# Altium PCB Projekt_Pcb.PcbDoc
Units mm, origin at the board's own origin, x right, y up, seen from the top; angles counter-clockwise.
Board outline 36 x 35 mm, 2 copper layers (Top Layer, Bottom Layer); 39 components, 31 nets, 164 pads, 17 vias.
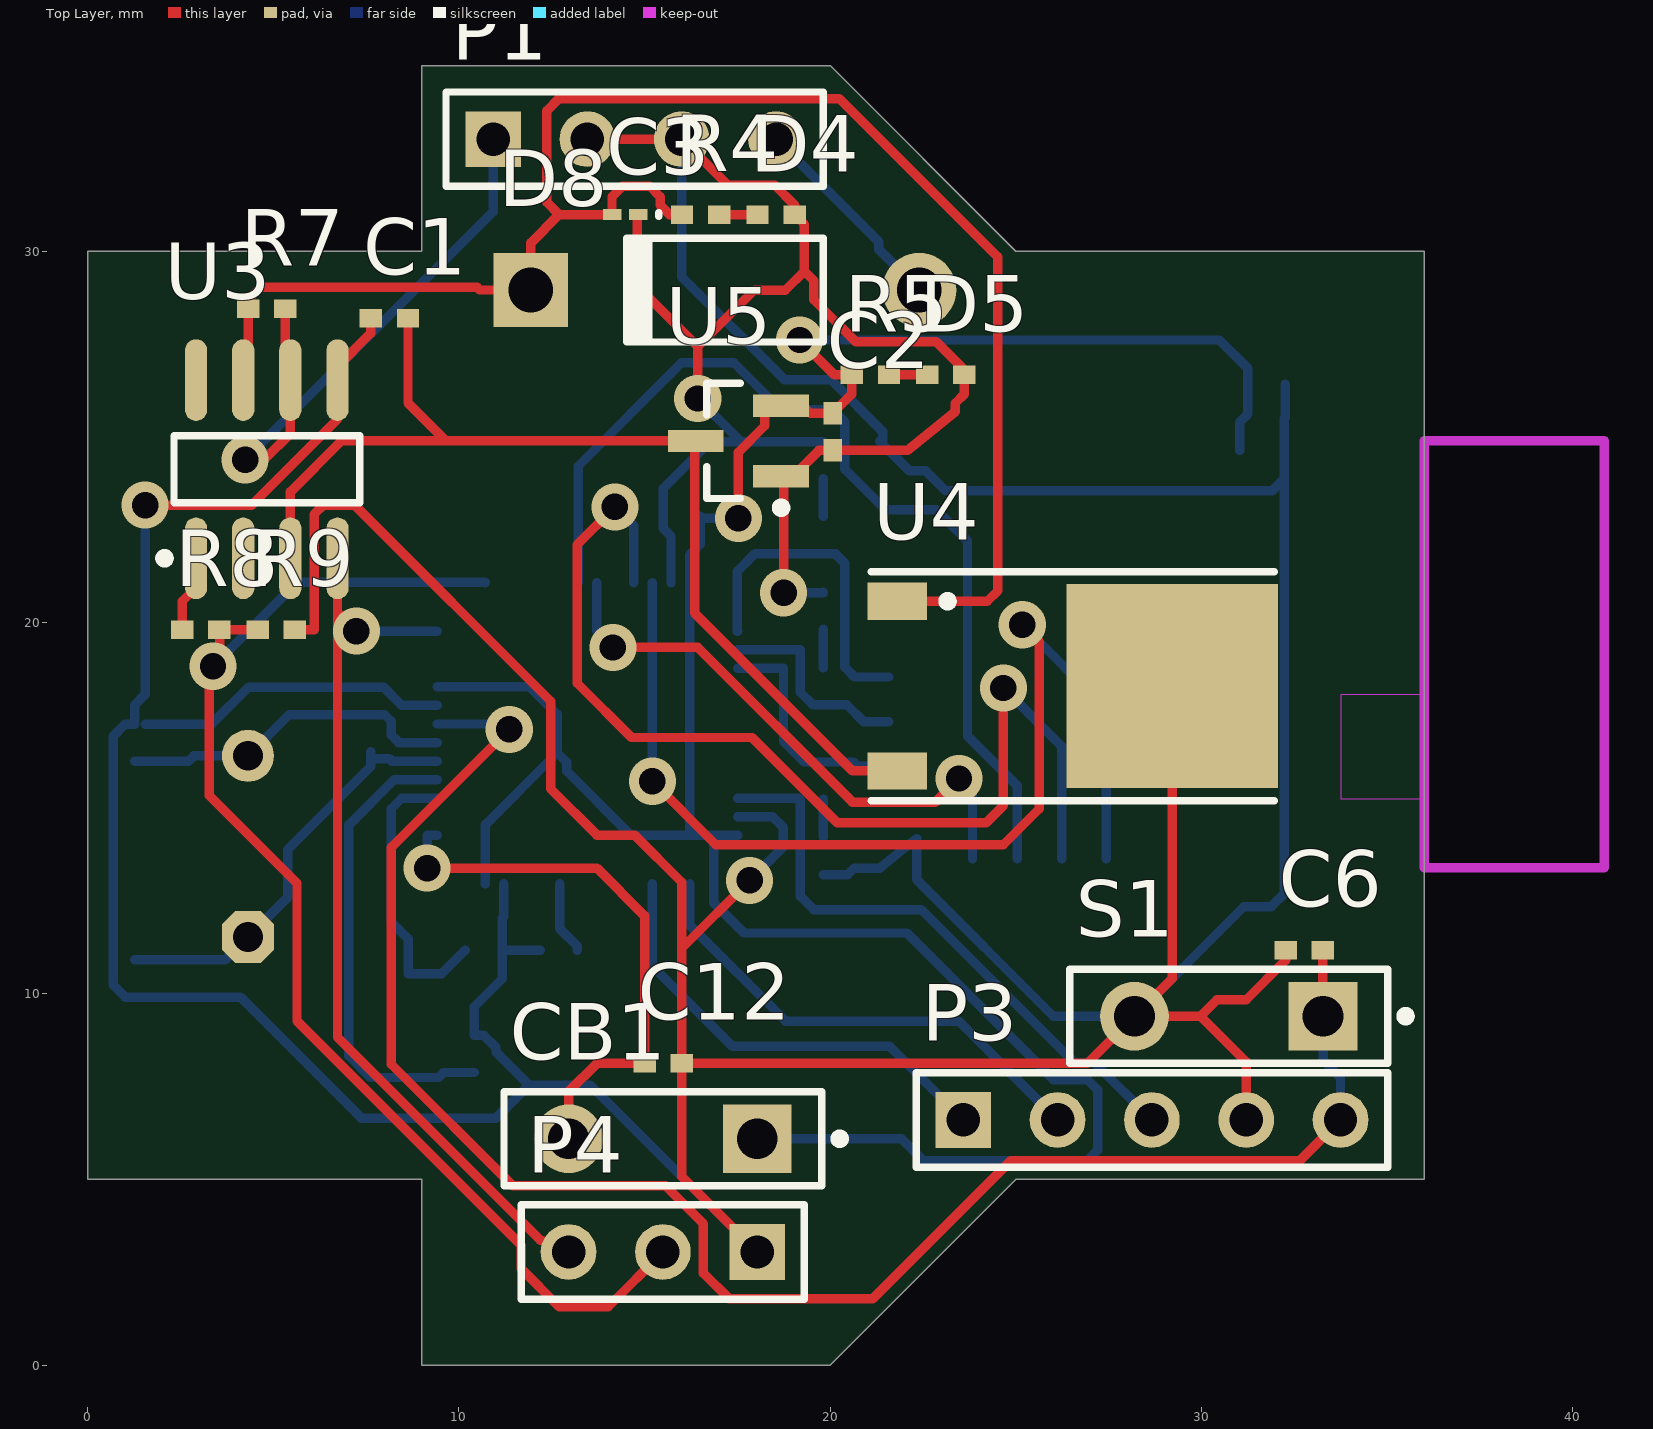
[diagram p0: Top Layer view]
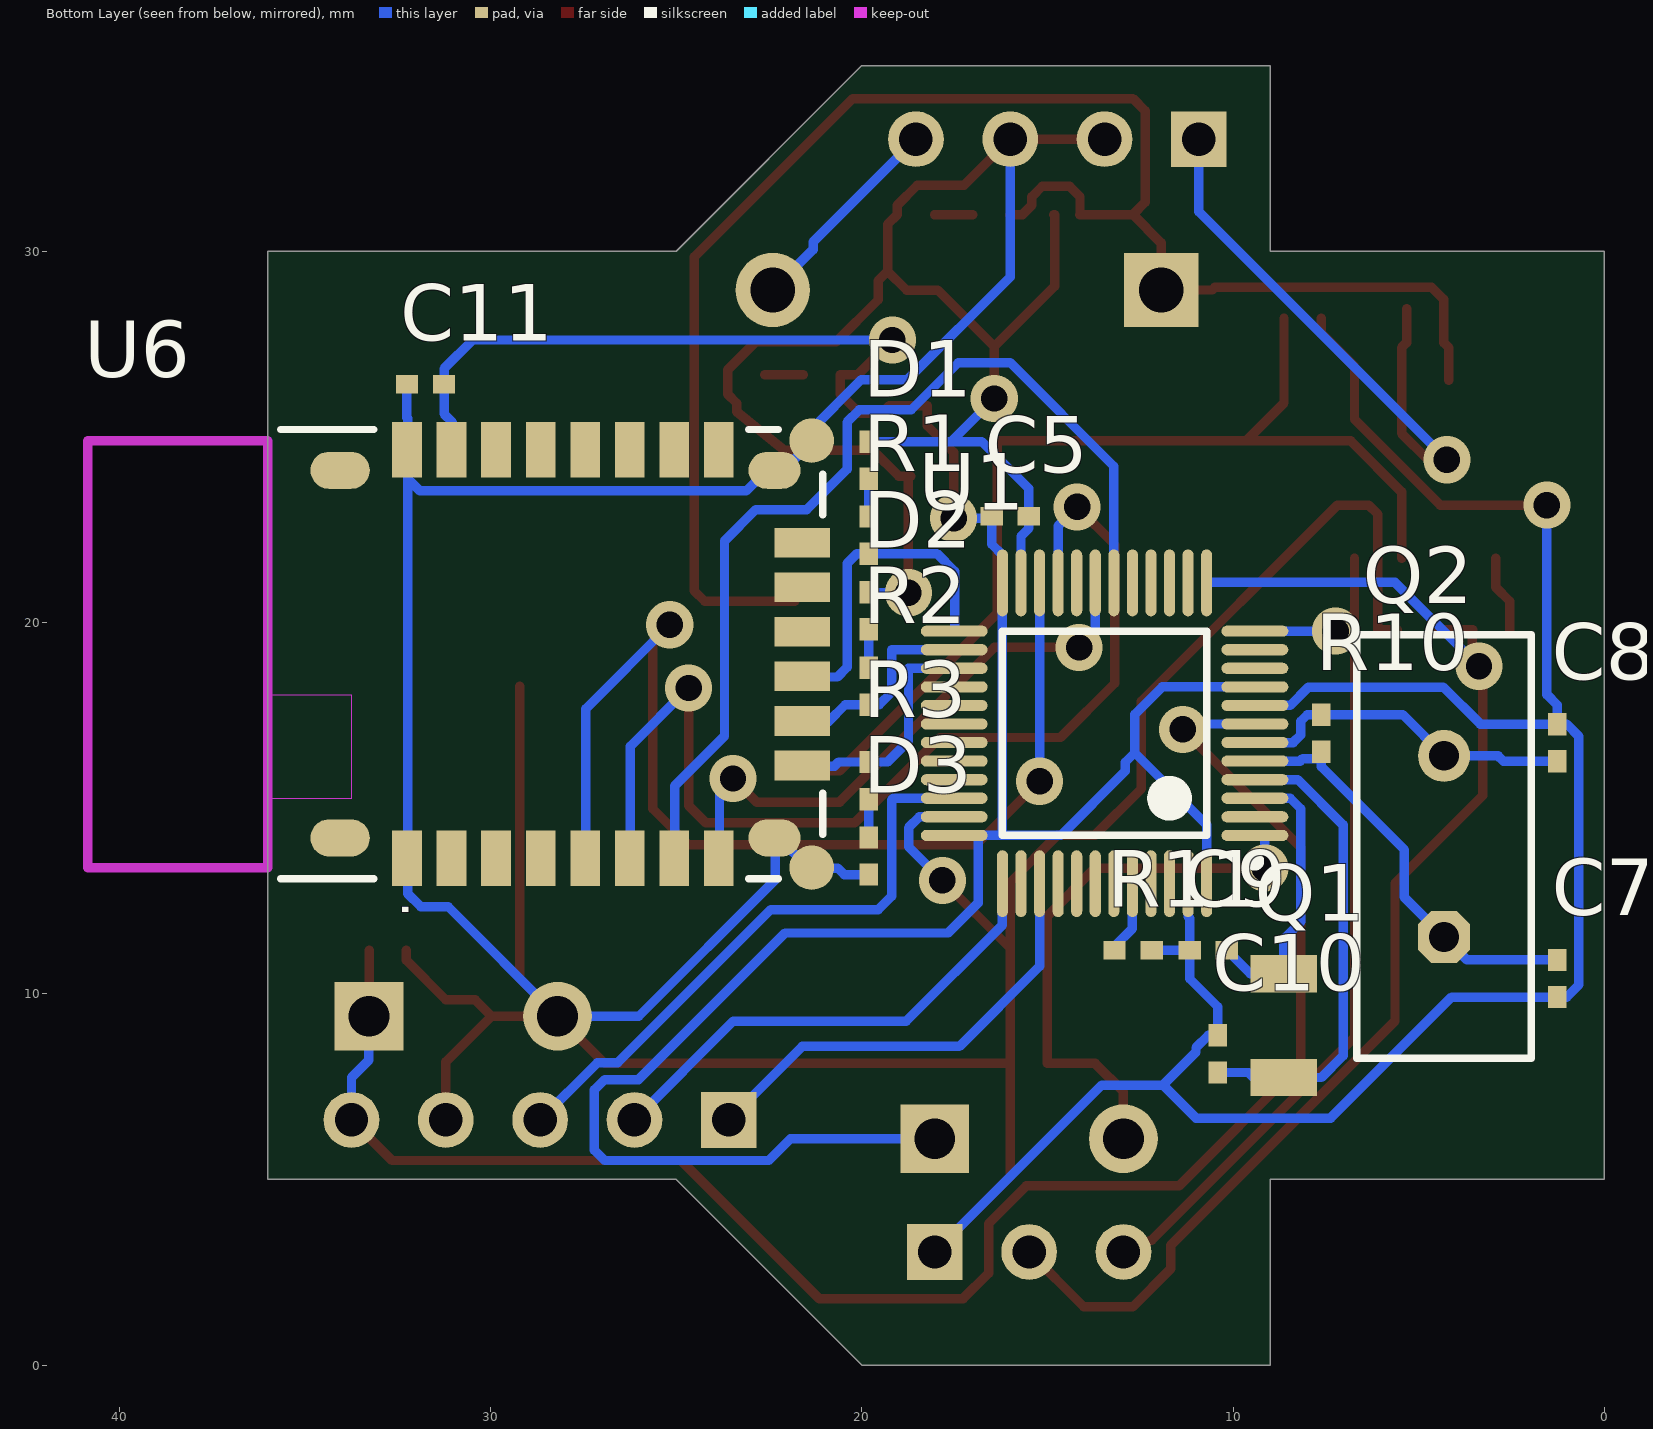
[diagram p1: Bottom Layer view, seen from below]

## Layer stack, top to bottom
Top Solder: solder mask 0.0102, Solder Resist, Dk 3.5
Top Layer: signal copper 0.0356
Dielectric1: dielectric 0.32, FR-4, Dk 4.8
Bottom Layer: signal copper 0.0356
Bottom Solder: solder mask 0.0102, Solder Resist, Dk 3.5

## Board outline
9,0 9,5 0,5 0,30 9,30 9,35 20,35 25,30 36,30 36,5 25,5 20,0

## Design rules (kind name [scope] priority, off if disabled: settings)
Clearance [All] p1: gap=0.2 ignorepadtopadclearanceinfootprint=TRUE except(0: Arc-Hole Track-Hole SMDPad-Hole THPad-Hole Via-Hole Fill-Hole Poly-Hole Region-Hole Text-Hole)
FabricationTestPointUsage TestPointUsage [All] p1: valid=0 allowmultiple=FALSE
FabricationTestpoint Testpoint [All] p1: side=3 testpointundercomponent=TRUE minsize=1.016 maxsize=2.54 preferedsize=1.524 minholesize=0 maxholesize=1.016 preferedholesize=0.813 testpointgrid=0.025 allowsidetop=TRUE allowsidebottom=TRUE usegrid=TRUE gridtolerance=0
PolygonConnect [All] p1: connectstyle=Relief reliefconductorwidth=0.254 reliefentries=4 polygonreliefangle="90 Angle" airgapwidth=0.254
RoutingVias [All] p1: holewidth=0.711 width=1.27 viastyle="Through Hole" minholewidth=0.711 minwidth=1.27 maxholewidth=0.711 maxwidth=1.27
SMDNeckDown [All] p1: percent=100.000
SilkToSolderMaskClearance SilkscreenOverComponentPads [IsPad] p1: minsilkscreentomaskgap=0.254 clearancetoexposedcopper=TRUE
SolderMaskExpansion [All] p1: expansion=0.102
Width [All] p1: maxlimit=0.254 minlimit=0.254 preferedwidth=0.254
27 further rules are at their usual default settings.

## Components (designator, comment, footprint, x,y, rotation, side; value= is the part's Value field where it differs from the comment)
C1 "1u" 0402 8.128,28.194 r0 top
C2 "1u" 0402 20.066,25.138 r90 top
C3 "1u" 0603 14.478,30.988 r180 top
C5 "100n" 0402 16.002,22.86 r0 bottom
C6 "100n" 0402 32.766,11.176 r0 top
C7 "22p" 0402 1.27,10.414 r270 bottom
C8 "22p" 0402 1.27,16.764 r90 bottom
C9 "10p" 0402 10.668,11.176 r180 bottom
C10 "10p" 0402 10.414,8.382 r270 bottom
C11 "4.7uF" 0402 31.75,26.416 r0 bottom
C12 "1u" 0402 15.502,8.128 r180 top
CB1 "Circuit Breaker" SPST-2 15.494,6.096 r180 top
D1 "Red" 0402 19.812,24.372 r90 bottom
D2 "Red" 0402 19.812,20.316 r90 bottom
D3 "Red" 0402 19.812,13.712 r270 bottom
D4 "Red" 0402 18.542,30.988 r0 top
D5 "Red" 0402 23.114,26.67 r0 top
D8 "Diode 1N4007" DO-41 17.168,28.956 r180 top
P1 "Header 4" HDR1X4 10.922,33.02 r0 top
P3 "Header 5" HDR1X5 23.584,6.604 r0 top
P4 "Header 3" HDR1X3 18.034,3.048 r180 top
Q1 "32.768kHz" Kwarc 8.636,9.144 r270 bottom
Q2 "8MHz" HC-49U 4.318,13.97 r90 bottom
R1 "330" 0402 19.812,22.356 r270 bottom
R2 "330" 0402 19.812,18.284 r270 bottom
R3 "330" 0402 19.812,15.744 r90 bottom
R4 "330" 0402 16.51,30.988 r180 top
R5 "330" 0402 21.082,26.67 r180 top
R7 "510" 0402 4.826,28.448 r0 top
R8 "12k" 0402 3.048,19.812 r180 top
R9 "22k" 0402 5.08,19.812 r180 top
R10 "1M" 0402 7.62,17.018 r270 bottom
R11 "10k" 0402 12.692,11.176 r180 bottom
S1 "SW-PB" SPST-2 30.734,9.398 r180 top
U1 "STM32F103CBT6" LQFP48_N 13.462,17.018 r0 bottom
U3 "L9637D" SO8_N 4.826,24.13 r90 top
U4 "MC78M05BDTRK" 369A-13 25.51,18.288 r270 top
U5 "MCP1703T-3302E/CB" SOT-23A-CB3_N 17.526,24.892 r180 top
U6 "RN4020-V/RM" RN4020_ALT 32.25,13.65 r90 bottom

## Footprints (in the part's own frame and the unit in brackets; to place one, negate y for a bottom-side part, rotate by r counter-clockwise, add the part's x,y. Pads: shape width x height; smd on the part's side, far side on the other; paste and mask are expansions set on the pad)
369A-13 [mm] "D-PAK/TO-252-AA; 3 Leads (1 Cropped); Body 10.3 (inc. leads) x 6.7 mm (LxW max)"
  rect 1x1.6 smd: 1(-2.285,-3.7) 3(2.285,-3.7)
  rect 5.5x5.7 smd: 4(0,3.7)
  silkscreen extent -3.08,-4.4 3.08,6.45
0402 [mm] "Chip Capacitor, Body 1.0x0.5mm, IPC High Density"
  rect 0.6x0.5 smd: 1(-0.5,0) 2(0.5,0)
  body extent -0.55,-0.3 0.55,0.3, height 1.3
0603 [mm] "Chip Inductor, Body 0.6x0.3mm, IPC High Density"
  rect 0.5x0.3 smd: 1(-0.35,0) 2(0.35,0)
  silkscreen extent -0.9,-0.05 -0.9,0.05, body extent -0.33,-0.18 0.33,0.18, height 0.55
DO-41 [mm] "Diode, Axial; Body 5.2 x 2.7 mm (LxDia. max), Lead Dia. 0.86 mm (max)"
  round 2 hole 1.2: 1(-5.23,0)
  rect 2x2 hole 1.2: 2(5.23,0)
  silkscreen extent -2.65,-1.4 2.75,1.4
HC-49U [mm] "Quartz Crystal, Thru-Hole; 2 Leads; Body 11.35 x 4.65 x 13.46 mm (LxWxH max)"
  oct 1.4x1.4 hole 0.8: 1(-2.44,0)
  round 1.4 hole 0.8: 2(2.44,0)
  silkscreen extent -5.7,-2.35 5.7,2.35
HDR1X3 [mm] "Connector; Header; 3 Position"
  rect 1.5x1.5 hole 0.9: 1(0,0)
  round 1.5 hole 0.9: 2(2.54,0) 3(5.08,0)
  silkscreen extent -1.27,-1.27 6.35,1.27
HDR1X4 [mm] "Connector; Header; 4 Position"
  rect 1.5x1.5 hole 0.9: 1(0,0)
  round 1.5 hole 0.9: 2(2.54,0) 3(5.08,0) 4(7.62,0)
  silkscreen extent -1.27,-1.27 8.89,1.27
HDR1X5 [mm] "Connector; Header; 5 Position"
  rect 1.5x1.5 hole 0.9: 1(0,0)
  round 1.5 hole 0.9: 2(2.54,0) 3(5.08,0) 4(7.62,0) 5(10.16,0)
  silkscreen extent -1.27,-1.27 11.43,1.27
Kwarc [mm] "Chip Inductor, Body 3.2x1.5mm, IPC High Density"
  rect 1x1.8 smd: 1(-1.397,0) 2(1.397,0)
  body extent -1.7,-0.9 1.7,0.9, height 0.55
LQFP48_N [mm] "Thin QFP, 48-Leads, Body 7x7mm, Pitch 0.5mm, IPC Medium Density"
  oval 1.8x0.3 smd: 1(-4.05,2.75) 2(-4.05,2.25) 3(-4.05,1.75) 4(-4.05,1.25) 5(-4.05,0.75) 6(-4.05,0.25) 7(-4.05,-0.25) 8(-4.05,-0.75) 9(-4.05,-1.25) 10(-4.05,-1.75) 11(-4.05,-2.25) 12(-4.05,-2.75) 25(4.05,-2.75) 26(4.05,-2.25) 27(4.05,-1.75) 28(4.05,-1.25) 29(4.05,-0.75) 30(4.05,-0.25) 31(4.05,0.25) 32(4.05,0.75) 33(4.05,1.25) 34(4.05,1.75) 35(4.05,2.25) 36(4.05,2.75)
  oval 0.3x1.8 smd: 13(-2.75,-4.05) 14(-2.25,-4.05) 15(-1.75,-4.05) 16(-1.25,-4.05) 17(-0.75,-4.05) 18(-0.25,-4.05) 19(0.25,-4.05) 20(0.75,-4.05) 21(1.25,-4.05) 22(1.75,-4.05) 23(2.25,-4.05) 24(2.75,-4.05) 37(2.75,4.05) 38(2.25,4.05) 39(1.75,4.05) 40(1.25,4.05) 41(0.75,4.05) 42(0.25,4.05) 43(-0.25,4.05) 44(-0.75,4.05) 45(-1.25,4.05) 46(-1.75,4.05) 47(-2.25,4.05) 48(-2.75,4.05)
  silkscreen extent -4.17,-2.75 2.75,3.57, body extent -3.5,-3.5 3.5,3.5, height 1.6
RN4020_ALT [mm] "Bluetooth BLE Module - Microchip"
  rect 1.5x0.8 smd: 1(0,0) 2(0,-1.2) 3(0,-2.4) 4(0,-3.6) 5(0,-4.8) 6(0,-6) 7(0,-7.2) 8(0,-8.4) 17(11,-8.4) 18(11,-7.2) 19(11,-6) 20(11,-4.8) 21(11,-3.6) 22(11,-2.4) 23(11,-1.2) 24(11,0)
  oval 1x1.6 smd: 1A(0.55,1.8) 24A(10.45,1.8)
  round 1.2 smd: 9(-0.25,-10.9) 16(11.25,-10.9)
  oval 1x1.4 smd: 9(0.55,-9.9) 16(10.45,-9.9)
  rect 0.8x1.5 smd: 10(2.5,-10.65) 11(3.7,-10.65) 12(4.9,-10.65) 13(6.1,-10.65) 14(7.3,-10.65) 15(8.5,-10.65)
  Keep-Out Layer region: -0.25,8.601 11.25,8.601 11.25,3.651 -0.25,3.651
  Keep-Out Layer region: 1.6,3.651 4.4,3.651 4.4,1.501 1.6,1.501
  silkscreen extent -0.55,-11.2 11.55,3.4, body extent -0.25,-10.9 11.25,8.6, height 2.3
SO8_N [mm] "SOIC, 8-Leads, Body 4.9x3.9mm, Pitch 1.27mm, IPC Medium Density"
  oval 2.2x0.6 smd: 1(-2.4,1.905) 2(-2.4,0.635) 3(-2.4,-0.635) 4(-2.4,-1.905) 5(2.4,-1.905) 6(2.4,-0.635) 7(2.4,0.635) 8(2.4,1.905)
  silkscreen extent -2.52,-2.5 0.9,2.88, body extent -1.95,-2.45 1.95,2.45, height 1.75
SOT-23A-CB3_N [mm] "SOT346, 3-Leads, Body 2.9x1.5mm, Pitch 0.95mm, Lead Span 2.6mm, IPC Medium Density"
  rect 1.5x0.6 smd: 1(-1.15,0.95) 2(-1.15,-0.95) 3(1.15,0)
  silkscreen extent -1.28,-1.55 0.85,1.92, body extent -0.85,-1.55 0.85,1.55, height 1.45
SPST-2 [mm] "Switch; 2 Leads"
  rect 1.85x1.85 hole 1.1: 1(-2.54,0)
  round 1.85 hole 1.1: 2(2.54,0)
  silkscreen extent -4.89,-1.27 4.28,1.27

## Part data
C1 C2 C3 C5 C6 C7 C8 C9 C10 C11 C12: library part Cap, "Capacitor", LatestRevisionDate=17-Jul-2002, LatestRevisionNote="Re-released for DXP Platform.", PackageDescription="Radial Cap, Thru-Hole; 2 Leads; 0.3 in Pin Spacing", PackageReference=RAD-0.3, Published=8-Jun-2000, Publisher="Altium Limited"
D1 D2 D3 D4 D5: library part LED2, "Typical RED, GREEN, YELLOW, AMBER GaAs LED", LatestRevisionDate=17-Jul-2002, LatestRevisionNote="Re-released for DXP Platform.", PackageDescription="SM LED; 2 Flat Leads", PackageReference=3.2X1.6X1.1, PackageVersion=Feb-2002, Published=8-Jun-2000, Publisher="Altium Limited"
D8: "1 Amp General Purpose Rectifier", Code_JEDEC=DO-204-AL, ComponentLink1Description="Manufacturer Link", ComponentLink1URL=http://www.fairchildsemi.com/, ComponentLink2Description=Datasheet, ComponentLink2URL=http://www.fairchildsemi.com/ds/1N%2F1N4001.pdf, DatasheetVersion=1998, LatestRevisionDate=17-Jul-2002, LatestRevisionNote="Re-released for DXP Platform.", PackageDescription="Diode, Axial; Body 5.2 x 2.7 mm (LxDia. max), Lead Dia. 0.86 mm (max)", PackageReference=DO-41, PackageVersion=Aug-1999, Published=8-Jun-2000, Publisher="Altium Limited"
P1: "Header, 4-Pin", LatestRevisionDate=17-Jul-2002, LatestRevisionNote="Re-released for DXP Platform.", Publisher="Altium Limited"
P3: "Header, 5-Pin", LatestRevisionDate=17-Jul-2002, LatestRevisionNote="Re-released for DXP Platform.", Publisher="Altium Limited"
P4: "Header, 3-Pin", LatestRevisionDate=17-Jul-2002, LatestRevisionNote="Re-released for DXP Platform.", Publisher="Altium Limited"
Q1: library part XTAL, "Crystal Oscillator", LatestRevisionDate=17-Jul-2002, LatestRevisionNote="Re-released for DXP Platform.", PackageDescription="Crystal, Thru-Hole; 2 Leads; Body 3.1 x 8.2 mm (Dia.xH)", PackageReference=R38, Published=8-Jun-2000, Publisher="Altium Limited"
Q2: library part ECS-10-13-1, "Crystal Oscillator", ComponentLink1Description="Manufacturer Link", ComponentLink1URL=http://www.ecsxtal.com/, ComponentLink2Description=Datasheet, ComponentLink2URL=http://www.ecsxtal.com/pdf2/HC49U.PDF, DatasheetDocument=18-Apr-2000, PackageReference=HC-49U, Published=17-Jul-2002, Publisher="Altium Limited"
R1 R2 R3 R4 R5 R7 R8 R9 R10 R11: library part Res2, "Resistor", LatestRevisionDate=17-Jul-2002, LatestRevisionNote="Re-released for DXP Platform.", PackageDescription="Axial Device, Thru-Hole; 2 Leads; 0.4 in Pin Spacing", PackageReference=AXIAL-0.4, Published=8-Jun-2000, Publisher="Altium Limited"
S1: "Switch", LatestRevisionDate=17-Jul-2002, LatestRevisionNote="Re-released for DXP Platform.", PackageDescription="Switch; 2 Leads", PackageReference=SPST-2, Published=24-Mar-1999, Publisher="Altium Limited"
U1: "STM32 ARM-based 32-bit MCU with 128 Kbytes Flash, 48-pin LQFP, Industrial Temperature", ComponentLink1Description="Manufacturer Link", ComponentLink1URL=www.st.com/stm32, ComponentLink2Description=Datasheet, ComponentLink2URL=http://www.st.com/stonline/products/literature/ds/13587.pdf, DatasheetVersion="rev6, Mar-2008", PackageDescription="48-Pin Low-Profile Quad Flat Pack, 7 x 7 mm Body, 0.5 mm Pitch (LQFP48)", PackageReference=LQFP48, PackageVersion=Mar-2008, Published=30-May-2008, Publisher="Altium Limited"
U3: "ISO 9141 Interface", Code_IPC=SOIC127P600-8, Code_JEDEC=MS-012-AA, ComponentLink1Description="Manufacturer Link", ComponentLink1URL=http://www.st.com/, ComponentLink2Description=Datasheet, ComponentLink2URL=http://www.st.com/stonline/products/literature/ds/1765/l9637.pdf, DatasheetVersion=Dec-1998, LatestRevisionDate=13-Apr-2006, LatestRevisionNote="IPC-7351 Footprint Added.", PackageDescription="8-Pin Small Outline Integrated Circuit 1.27 mm Pitch", PackageReference=SO8, PackageVersion=Dec-2002, Published=24-Aug-2001, Publisher="Altium Limited"
U4: "Three-Terminal Medium Current Positive Voltage Regulator", ComponentLink1Description="Manufacturer Link", ComponentLink1URL=http://www.onsemi.com/site/products/taxonomy/0,4438,503,00.html, ComponentLink2Description=Datasheet, ComponentLink2URL=http://www.onsemi.com/pub/Collateral/MC78M00-D.PDF, DatasheetVersion=Apr-2000, Note="Pin 2 is electrically connected to Pin 4; Pin 2 is trimmed and not drawn;", PackageDescription="D-PAK/TO-252-AA; 3 Leads (1 Cropped); Body 10.3 (inc. leads) x 6.7 mm (LxW max)", PackageReference=369A-13, PackageVersion=1997, Published=15-Apr-2002, Publisher="Altium Limited"
U5: "250 mA, 16V, Low Quiescent Current LDO Regulator, 3-Pin SOT-23A, Extended Temperature, Tape and Reel", Supplier Part Number 1=MCP1703T-3302E/CBTR-ND, ComponentLink1Description=Datasheet, ComponentLink1URL=http://ww1.microchip.com/downloads/en/DeviceDoc/22049d.pdf, ComponentLink2Description="Packaging Specification", ComponentLink2URL=http://www.microchip.com/stellent/groups/techpub_sg/documents/packagingspec/en012702.pdf, ComponentLink3Description="Microchip.com Home", ComponentLink3URL=http://www.microchip.com/, DatasheetVersion="revD, Sep-2009", PackageDescription="3-Lead Plastic Small Outline Transistor (CB) [SOT-23A]", PackageReference=SOT-23A-CB3, PackageVersion="revBB, Aug-2009", Published=29-Jan-2009, Publisher="Altium Limited", Supplier 1=Digi-Key, Supplier 2=Digi-Key, Supplier 3=Digi-Key, Supplier 4=Farnell, Supplier Part Number 2=MCP1703T-3302E/CBCT-ND, Supplier Part Number 3=MCP1703T-3302E/CBDKR-ND, Supplier Part Number 4=1439518
U6: library part RN2020-V/RM123, "Microchip RN4020 Bluetooth"
CB1: LatestRevisionDate=17-Jul-2002, LatestRevisionNote="Re-released for DXP Platform.", PackageDescription="Switch; 2 Leads", PackageReference=SPST-2, Published=24-Mar-1999, Publisher="Altium Limited"

## Via types
v1: diameter 1.27, hole 0.711, Top Layer to Bottom Layer, 17 vias

## Nets (pads, with @x,y where several pads share a name; then routed paths per layer and width w, separated by ;. In a path a pad name is that pad's centre, name@x,y a point inside that pad or via, vN(x,y) a via of type N, cw(c..) or ccw(c..) an arc to the next point about the centre after c; other vN are vias at no path point)
3.3V: C2.2 C5.2 C11.1 CB1.1 R5.2 U1.9 U1.24 U1.36 U1.48 U5.2 U6.23 | length 73.1
  Top Layer w0.254: v1(17.526,22.809) 17.526,24.587 18.237,25.298 18.237,25.842 U5.2 19.253,25.842 19.457,25.638 C2.2 20.582,26.154 R5.2 20.117,26.67 v1(19.177,27.61)
  Bottom Layer w0.254: U1.9 11.907,18.268 12.649,17.526 12.649,16.491 ; U1.48 10.712,14.554 12.649,16.491 ; U1.36 U1.36@16.869,14.268 ; v1@17.526,22.606 v1(17.526,22.809) 16.553,22.809 C5.2 16.502,22.109 16.212,21.819 U1.24 16.212,14.268 ; CB1.1 21.92,6.096 22.504,5.512 26.924,5.512 27.203,5.791 27.203,7.413 26.924,7.692 26.014,7.692 22.066,11.64 17.675,11.64 16.869,12.446 U1.36@16.869,14.268 ; v1(19.177,27.61) 30.48,27.61 31.25,26.84 C11.1 31.25,25.618 31.032,25.4 U6.23@31.032,24.634 ; 12.649,16.491 12.903,16.237 12.903,16.002 14.637,14.268 16.212,14.268 ; 16.212,14.268 U1.36@16.869,14.268
12V: D8.1 P1.4 | length 5.7
  Bottom Layer w0.254: P1.4 21.311,30.251 21.311,30.043 D8.1
GND: C1.1 C2.1 C3.1 C5.1 C6.1 C7.2 C8.2 C9.1 C10.1 C11.2 C12.1 D1.2 D2.2 D3.2 D4.2 D5.2 P1.2 P1.3 P3.4 P4.1 R9.1 R11.2 S1.2 U1.8 U1.23 U1.35 U1.47 U3.5 U4.4 U5.1 U6.1 U6.9 U6.16 U6.24 | length 222.2
  Top Layer w0.254: v1(1.549,23.165) 4.42,23.165 6.731,25.476 U3.5 6.731,26.899 7.628,27.796 C1.1 ; R9.1 6.101,19.812 6.101,22.916 6.35,23.165 7.188,23.165 12.471,17.882 12.471,15.519 13.716,14.275 14.732,14.275 16.002,13.005 16.002,11.227 ; P1.2 P1.3 17.247,31.775 18.509,31.775 19.042,31.242 D4.2 19.304,30.726 19.304,29.464 ; C3.1 14.808,30.988 14.808,29.058 16.434,27.432 ; v1(16.434,26.035) 16.434,27.432 ; v1(17.831,13.056) 16.002,11.227 ; P4.1 16.002,5.08 C12.1 ; U5.1 U5.1@18.745,23.942 ; v1(18.745,20.803) U5.1@18.745,23.942 ; U4.4 29.21,10.414 S1.2 ; P3.4 31.204,8.166 29.972,9.398 ; C6.1 32.266,10.905 31.204,9.843 30.417,9.843 29.972,9.398 ; C12.1 26.924,8.128 S1.2 ; C12.1 16.002,11.227 ; 16.434,27.432 17.95,28.948 18.788,28.948 19.304,29.464 ; U5.1@18.745,23.942 18.999,23.942 19.695,24.638 C2.1 22.09,24.638 23.368,25.679 23.368,25.908 23.614,26.154 D5.2 23.614,26.805 22.86,27.559 20.693,27.559 19.558,28.694 19.558,29.21 19.304,29.464 ; S1.2 29.972,9.398
  Bottom Layer w0.254: 1.549,17.264 3.339,17.264 4.338,18.263 7.968,18.263 8.463,17.768 U1.8 ; v1(1.549,23.165) 1.549,18.059 1.27,17.78 C8.2 1.016,17.264 0.686,16.934 0.686,10.244 1.016,9.914 C7.2 4.115,9.914 7.374,6.655 10.998,6.655 11.887,7.544 ; U1.47 11.212,12.084 11.168,12.04 C9.1 ; R11.2 C9.1 ; U1.23 15.712,22.327 15.502,22.537 C5.1 15.502,23.61 16.764,24.872 17.597,24.872 ; P1.3 16.002,29.307 18.766,26.543 20.015,26.543 21.412,25.146 U6.16@21.412,24.804 ; v1(16.434,26.035) 17.597,24.872 ; U1.35 18.449,14.768 18.739,14.478 18.739,13.964 v1(17.831,13.056) ; P4.1 13.538,7.544 11.887,7.544 ; v1(18.745,20.803) 19.812,20.803 D2.2 ; D3.2 20.472,13.212 20.644,13.384 21.332,13.384 U6.9@22.327,14.184 ; D1.2 17.597,24.872 ; U6.16@21.332,24.884 U6.16@21.412,24.804 ; U6.9@22.332,14.184 U6.9@22.327,14.184 ; C11.2 32.25,25.52 32.232,25.502 32.232,24.634 32.232,23.876 ; C9.1 11.168,10.406 10.414,9.652 C10.1 10.668,8.882 10.998,8.552 10.998,8.433 11.887,7.544 ; U6.16@21.412,24.804 22.132,24.084 22.332,24.084 22.576,24.084 23.114,23.546 31.902,23.546 32.232,23.876 ; U6.9@22.327,14.184 22.327,13.081 26.01,9.398 S1.2 31.14,12.344 31.876,12.344 32.232,12.7 32.232,13.634 32.232,23.876
"ISO9141-2 K": P1.1 R7.2 U3.6 | length 16.3
  Top Layer w0.254: v1(4.242,24.384) 4.75,24.384 5.461,25.095 U3.6 5.461,27.407 5.326,27.542 R7.2
  Bottom Layer w0.254: v1(4.242,24.384) 10.922,31.064 P1.1
NetC1_2: C1.2 U3.3 U4.3 U5.3 | length 28.9
  Top Layer w0.254: U3.3 5.461,23.52 6.833,24.892 9.652,24.892 ; C1.2 8.628,25.916 9.652,24.892 ; U5.3 U5.3@16.358,24.892 ; U4.3 20.601,16.003 16.358,20.246 U5.3@16.358,24.892 ; 9.652,24.892 U5.3@16.358,24.892
NetC3_2: C3.2 D8.2 R4.2 R7.1 U3.7 U4.1 | length 45.5
  Top Layer w0.254: U3.7 4.191,27.407 4.326,27.542 R7.1 4.326,28.702 4.656,29.032 10.49,29.032 10.566,28.956 D8.2 11.938,30.226 12.7,30.988 ; C3.2 C3.2@14.122,30.988 ; R4.2 15.672,30.988 15.418,31.242 15.418,31.471 15.138,31.75 14.402,31.75 14.122,31.471 C3.2@14.122,30.988 ; U4.1 24.232,20.573 24.511,20.852 24.511,29.847 20.246,34.112 12.7,34.112 12.37,33.782 12.37,31.318 12.7,30.988 ; 12.7,30.988 C3.2@14.122,30.988
NetC7_1: C7.1 Q2.1 R10.2 U1.5 | length 11.5
  Bottom Layer w0.254: C7.1 3.702,10.914 Q2.1 5.387,12.599 5.387,13.882 7.62,16.115 R10.2@7.62,16.337 ; R10.2 R10.2@7.62,16.337 ; U1.5 8.197,16.268 8.128,16.337 R10.2@7.62,16.337
NetC8_1: C8.1 Q2.2 R10.1 U1.6 | length 9.2
  Bottom Layer w0.254: C8.1 2.718,16.264 2.864,16.41 Q2.2 5.426,17.518 R10.1 8.001,17.518 8.179,17.34 8.179,16.972 8.382,16.768 U1.6
NetC9_2: C9.2 Q1.1 U1.3 | length 7.8
  Bottom Layer w0.254: U1.3 8.461,15.268 8.179,14.986 8.179,11.938 8.636,11.481 Q1.1 9.533,10.541 C9.2
NetC10_2: C10.2 Q1.2 U1.4 | length 12.8
  Bottom Layer w0.254: U1.4 8.255,15.768 7.036,14.549 7.036,8.331 7.62,7.747 Q1.2 9.449,7.747 9.584,7.882 C10.2
NetC12_2: C12.2 CB1.2 U1.1 | length 15.1
  Top Layer w0.254: v1(9.144,13.386) 13.716,13.386 15.002,12.1 C12.2 13.716,8.128 12.954,7.366 CB1.2
  Bottom Layer w0.254: v1(9.144,13.386) 9.144,14.268 U1.1
NetD1_1: D1.1 R1.1 | length 1
  Bottom Layer w0.254: R1.1 D1.1
NetD2_1: D2.1 R2.1 | length 1
  Bottom Layer w0.254: R2.1 D2.1
NetD3_1: D3.1 R3.1 | length 1
  Bottom Layer w0.254: D3.1 R3.1
NetD4_1: D4.1 R4.1 | length 1
  Top Layer w0.254: R4.1 D4.1
NetD5_1: D5.1 R5.1 | length 1
  Top Layer w0.254: R5.1 D5.1
NetP3_1: P3.1 U1.39 | length 12.3
  Bottom Layer w0.254: U1.39 15.212,10.744 17.371,8.585 21.603,8.585 P3.1
NetP3_2: P3.2 U1.37 | length 13.2
  Bottom Layer w0.254: U1.37 16.212,11.855 18.806,9.261 23.467,9.261 P3.2
NetP3_3: P3.3 U1.34 | length 16.3
  Bottom Layer w0.254: U1.34 19.156,15.268 19.193,15.231 19.193,12.633 19.558,12.268 22.454,12.268 26.576,8.146 27.122,8.146 P3.3
NetP4_2: P4.2 R8.1 R9.2 U1.13 | length 35.6
  Top Layer w0.254: v1(3.378,18.821) 3.556,18.999 v1@3.556,19.32 ; R8.1 R8.1@3.556,19.812 ; R9.2 R8.1@3.556,19.812 ; P4.2 14.021,1.575 12.7,1.575 11.684,2.591 11.684,3.224 5.639,9.269 5.639,12.979 3.277,15.342 3.277,19.05 v1@3.556,19.32 ; v1@3.556,19.32 R8.1@3.556,19.812
  Bottom Layer w0.254: v1(3.378,18.821) 5.639,21.082 10.712,21.082 U1.13
NetP4_3: P4.3 U1.12 U3.4 | length 24.3
  Top Layer w0.254: U3.4 6.731,20.276 ; v1(7.239,19.768) 6.731,20.276 ; P4.3 12.192,3.368 6.731,8.829 6.731,20.276
  Bottom Layer w0.254: v1(7.239,19.768) U1.12
NetR8_2: R8.2 U3.1 | length 2.1
  Top Layer w0.254: R8.2 2.548,20.574 2.921,20.947 U3.1
NetR11_1: R11.1 U1.44 | length 2
  Bottom Layer w0.254: U1.44 12.712,11.76 13.192,11.28 R11.1
NetU1_18: U1.18 U6.7 | length 26.6
  Bottom Layer w0.254: U1.18 13.212,24.21 15.999,26.997 17.404,26.997 18.67,25.73 20.066,25.73 20.396,25.4 20.396,24.13 21.488,23.038 22.86,23.038 23.698,22.2 23.698,16.942 25.032,15.608 U6.7@25.032,13.634
NetU1_19: U1.19 U6.8 | length 15.5
  Top Layer w0.254: v1(14.148,19.329) 16.434,19.329 20.599,15.164 22.835,15.164 v1(23.47,15.799)
  Bottom Layer w0.254: U1.19 13.712,19.765 v1(14.148,19.329) ; v1(23.47,15.799) 23.832,15.436 U6.8@23.832,13.634
NRST: C6.2 P3.5 S1.1 U1.7 | length 48.1
  Top Layer w0.254: v1(11.358,17.124) 8.179,13.945 8.179,8.103 11.455,4.826 15.57,4.826 16.586,3.81 16.586,2.477 17.272,1.792 21.15,1.792 24.87,5.512 32.652,5.512 P3.5 ; C6.2 33.266,9.406 S1.1
  Bottom Layer w0.254: U1.7 11.213,17.268 v1(11.358,17.124) ; S1.1 33.274,8.217 33.744,7.747 P3.5
PIO1: R3.2 U1.27 U6.10 | length 6.3
  Bottom Layer w0.254: U1.27 18.741,18.768 18.741,16.807 19.304,16.244 R3.2 20.625,16.244 20.735,16.134 U6.10@21.582,16.134
PIO2: R2.2 U1.26 U6.11 | length 5.5
  Bottom Layer w0.254: U1.26 19.195,19.268 19.195,18.121 19.533,17.784 R2.2 20.447,17.784 20.897,17.334 U6.11@21.582,17.334
PIO3: R1.2 U1.25 U6.12 | length 8.9
  Bottom Layer w0.254: U1.25 17.501,19.768 17.501,21.38 17.977,21.856 R1.2 20.13,21.856 20.396,21.59 20.396,18.796 20.658,18.534 U6.12@21.582,18.534
UART1_RX_STM: U1.22 U6.5 | length 29.3
  Top Layer w0.254: v1(15.212,15.725) 16.92,14.018 24.66,14.018 25.629,14.986 25.629,19.482 v1(25.171,19.939)
  Bottom Layer w0.254: v1(15.212,15.725) U1.22 ; v1(25.171,19.939) 27.432,17.678 U6.5@27.432,13.634
UART1_TX_STM: U1.21 U6.6 | length 29.1
  Top Layer w0.254: v1(14.202,23.114) 13.186,22.098 13.186,18.367 14.648,16.905 17.893,16.905 20.193,14.605 24.2,14.605 24.663,15.069 v1(24.663,18.237)
  Bottom Layer w0.254: v1(14.202,23.114) 14.712,22.604 U1.21 ; v1(24.663,18.237) 26.232,16.669 U6.6@26.232,13.634
pads on no net: U1.2 U1.10 U1.11 U1.14 U1.15 U1.16 U1.17 U1.20 U1.28 U1.29 U1.30 U1.31 U1.32 U1.33 U1.38 U1.40 U1.41 U1.42 U1.43 U1.45 U1.46 U3.2 U3.8 U6.1A U6.2 U6.3 U6.4 U6.13 U6.14 U6.15 U6.17 U6.18 U6.19 U6.20 U6.21 U6.22 U6.24A

## Keep-outs
Keep-Out Layer:
  lines w0.254: 36,13.4 36,24.9 40.851,24.9 40.851,13.4 36,13.4

## Silkscreen, mask and mechanical layers (free items; w line width, h text height)
Mechanical 1:
  the board outline again, w1.2
Mechanical 16:
  drawing of 1874 lines, arcs and shapes, not listed
  text "1" at -29.286,135.509 h1.78
  text "2" at 43.358,135.509 h1.78
  text "3" at 116.51,135.509 h1.78
  text "4" at 189.408,135.509 h1.78
  text "A" at -63.627,112.497 h1.78
  text "A" at 223.393,112.497 h1.78
  text "B" at -63.627,64.44 h1.78
  text "B" at 223.393,64.44 h1.78
  text "C" at -63.627,15.926 h1.78
  text "ENGINEER:" at 108.458,-21.082 h1.14
  text "TITLE:" at 146.558,-21.082 h1.14
  text "PCB DESIGNER:" at 108.458,-28.575 h1.14
  text "D" at -63.627,-32.08 h1.78
  text "D" at 223.393,-32.08 h1.78
  text "DATE:" at 108.458,-36.322 h1.14
  text "PART NO.:" at 146.558,-36.322 h1.14
  text "REV:" at 199.898,-36.322 h1.14
  text "C" at 8.293,-37.351 h1.78
  text "Altium Limited" at 75.438,-38.862 h1.78
  text ".PRINT_DATE" at 109.728,-39.37 h1.78
  text "12a Rodborough Rd" at 75.438,-41.402 h1.78
  text "Frenchs Forest" at 75.438,-43.942 h1.78
  text "FILE NAME:" at 108.458,-43.942 h1.14
  text "DWG NO:" at 146.558,-43.942 h1.14
  text "SCALE:" at 199.898,-43.942 h1.14
  text "NSW 2086" at 75.438,-46.482 h1.78
  text ".PCB_FILE_NAME_NO_PATH" at 109.728,-46.99 h1.78
  text "1" at -29.286,-52.451 h1.78
  text "2" at 43.358,-52.451 h1.78
  text "3" at 116.51,-52.451 h1.78
  text "4" at 189.408,-52.451 h1.78

## Dimensions
0,30 to 36,30 on Mechanical 1
0,5 to 0,30 on Mechanical 1
9,30 to 9,35 on Mechanical 1
25,5 to 36,5 on Mechanical 1
9,0 to 20,0 on Mechanical 1
0,5 to 9,5 on Mechanical 1

## Text inside footprints (layer, text, board x,y; h text height)
U6: Mechanical 11 "1" at 32.35,15 h1 r270